# Altium PCB Fuente Simetrica.PcbDoc
Units mm, origin at the board's own origin, x right, y up, seen from the top; angles counter-clockwise.
Board outline 53.21 x 77.09 mm, 2 copper layers (Top Layer, Bottom Layer); 13 components, 8 nets, 34 pads, 0 vias.
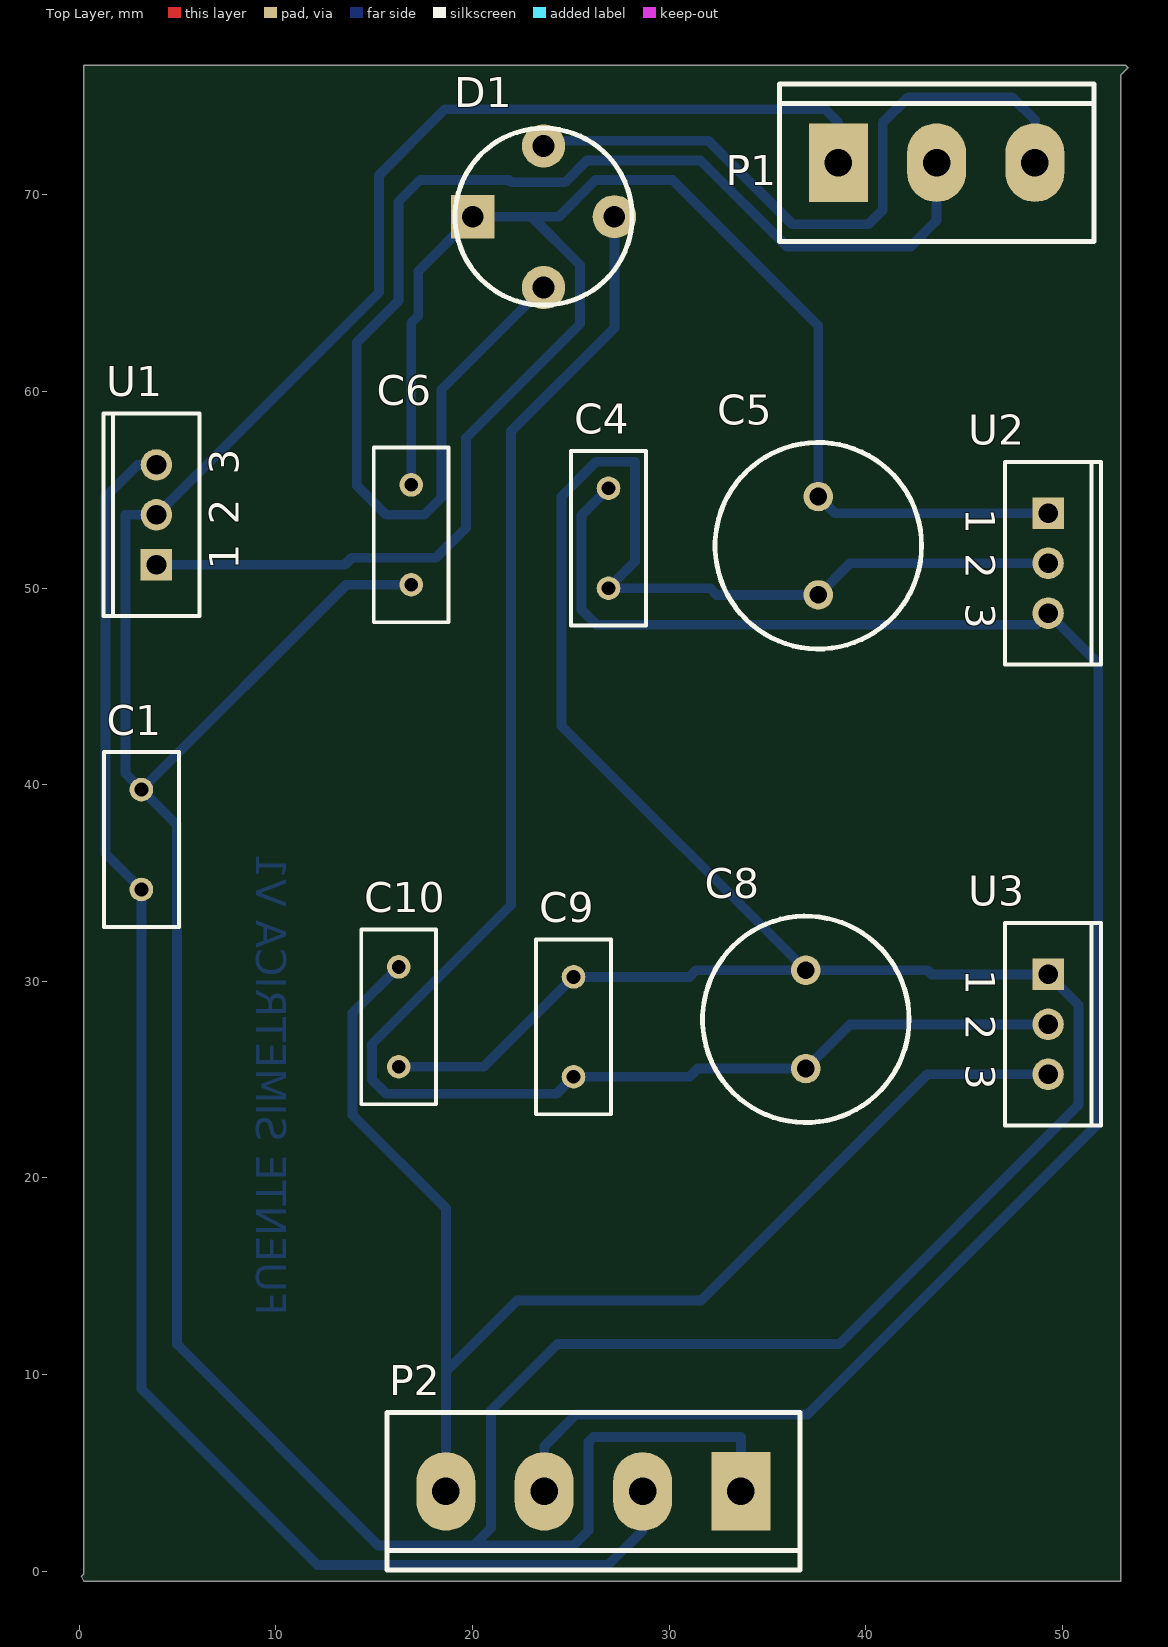
[diagram p0: Top Layer view]
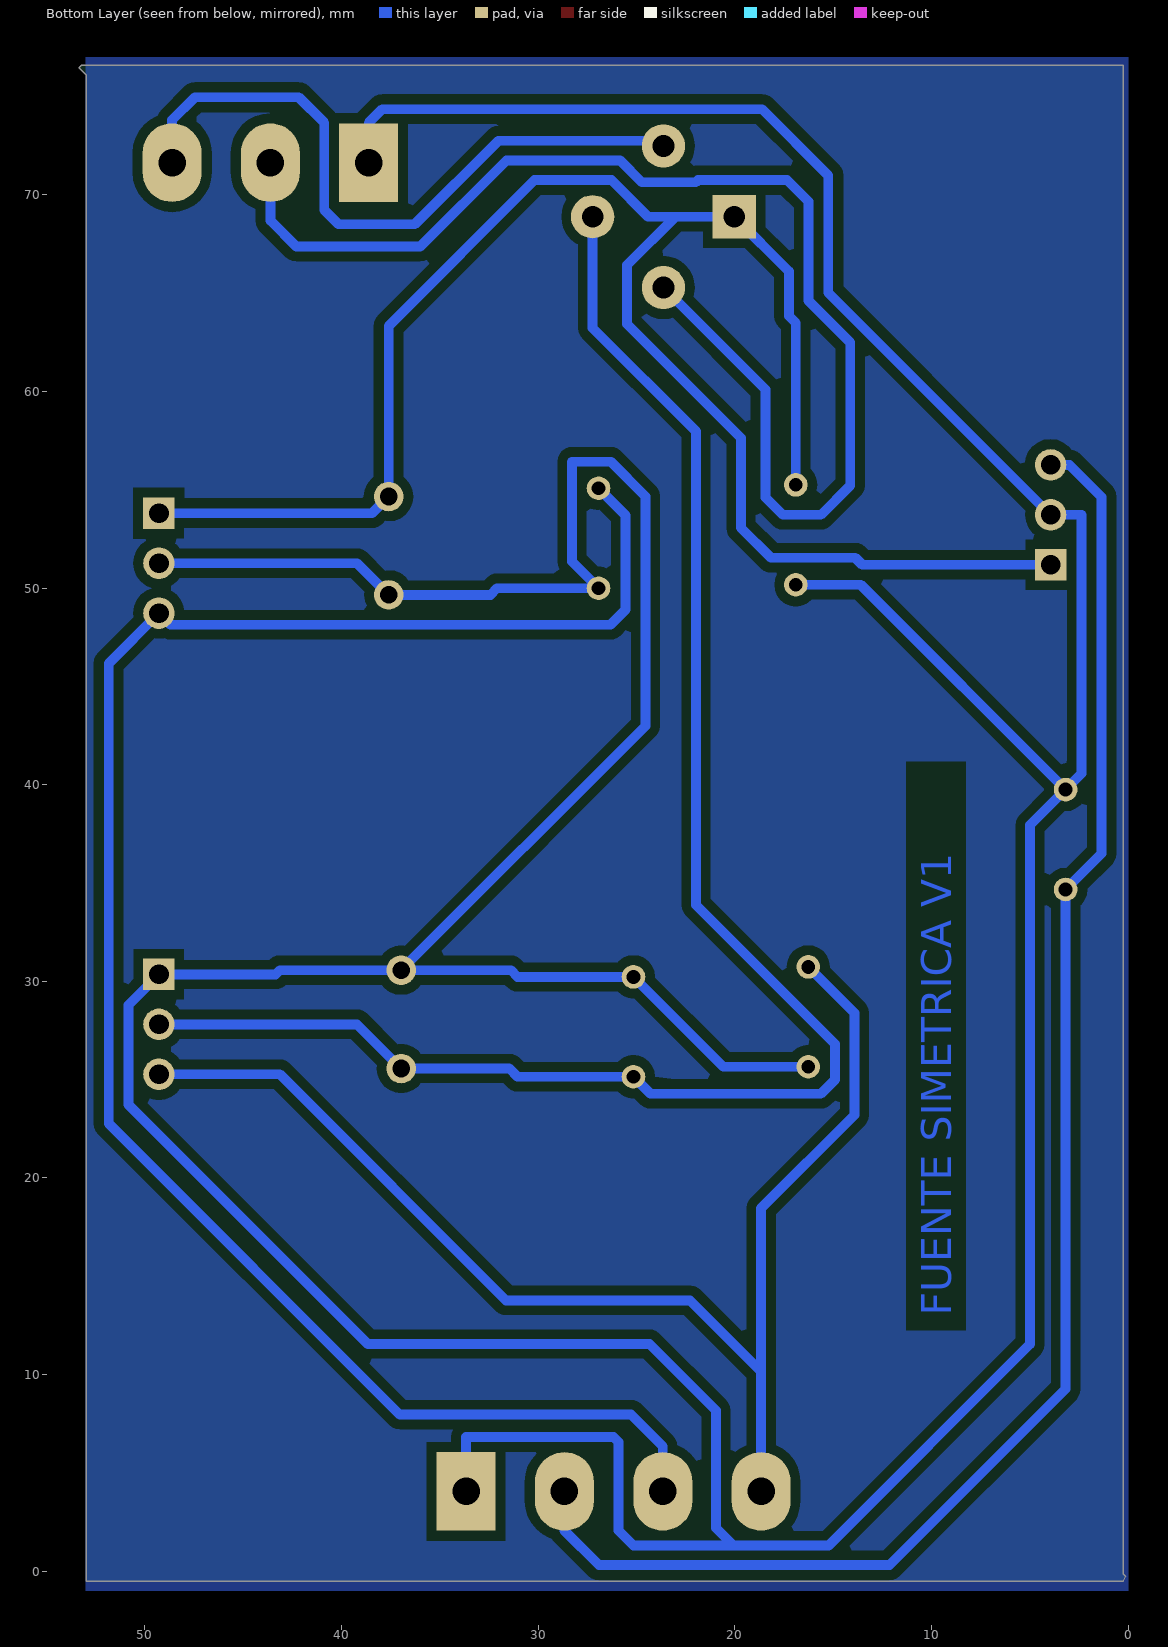
[diagram p1: Bottom Layer view, seen from below]

## Layer stack, top to bottom
Top Layer: signal copper 0.0356
Dielectric: dielectric 0.32, FR-4, Dk 4.8
Bottom Layer: signal copper 0.0356

## Board outline
0.254,-0.508 52.959,-0.508 52.959,76.073 53.34,76.454 53.213,76.581 0.254,76.581 0.254,-0.127 0.127,-0.254

## Design rules (kind name [scope] priority, off if disabled: settings)
Clearance [All] p1: gap=0.5
PolygonConnect [All] p1: connectstyle=Relief reliefconductorwidth=0.254 reliefentries=4 polygonreliefangle="90 Angle"
RoomDefinition "Fuente Simetrica" [InComponentClass('Fuente Simetrica')] p1: confinementstyle=ConfineIn formatcopy=TRUE lockcomponents=FALSE outline 0.381,-0.174 53.213,-0.174 53.213,76.915 0.381,76.915
RoutingLayers [All] p1: top layer_v5=FALSE bottom layer_v5=TRUE
RoutingVias [All] p1: holewidth=0.711 width=1.27 viastyle="Through Hole" minholewidth=0.711 minwidth=1.27 maxholewidth=0.711 maxwidth=1.27
SilkscreenOverComponentPads [All] p1: minsilkscreentomaskgap=0.254
SolderMaskExpansion [All] p1: expansion=0.102
Width [All] p1: maxlimit=0.7 minlimit=0.254 preferedwidth=0.5 toplayer_maxwidth=0.254 toplayer_prefwidth=0.254 bottomlayer_minwidth=0.5 minimp=50.000000 maximp=50.000000 favimp=50.000000
26 further rules are at their usual default settings.

## Components (designator, comment, footprint, x,y, rotation, side; value= is the part's Value field where it differs from the comment)
C1 "Cap" RAD-0.2 3.175,37.211 r270 top
C4 "Cap" RAD-0.2 26.924,52.531 r90 top
C5 "Cap Pol1" RB5-10.5 37.592,52.15 r270 top
C6 "Cap" RAD-0.2 16.891,52.705 r90 top
C8 "Cap Pol1" RB5-10.5 36.957,28.067 r270 top
C9 "Cap" RAD-0.2 25.146,27.686 r90 top
C10 "Cap" RAD-0.2 16.256,28.194 r90 top
D1 "Bridge1" PUENTE1A 23.622,65.278 r90 top
P1 "TRANS INPUT" AZUL5-3 38.608,71.628 r0 top
P2 "VOUT" AZUL5-4 33.655,4.064 r180 top
U1 "MC78M05BT" 221A-04 3.937,53.721 r90 top
U2 "MC78T12BT" 221A-04 49.276,51.261 r270 top
U3 "MC79M12CT" 221A-04 49.276,27.813 r270 top

## Footprints (in the part's own frame and the unit in brackets; to place one, negate y for a bottom-side part, rotate by r counter-clockwise, add the part's x,y. Pads: shape width x height; smd on the part's side, far side on the other; paste and mask are expansions set on the pad)
221A-04 [mm] "TO, Thru-Hole, Vertical, Heatsink Mounted; 3 In-Line Leads; Pitch 2.54 mm"
  rect 1.6x1.6 hole 1: 1(-2.54,0)
  round 1.6 hole 1: 2(0,0) 3(2.54,0)
  silkscreen extent -5.15,-2.2 5.15,2.7
AZUL5-3 [mm]
  rect 3x4 hole 1.4: 1(0,0)
  oval 3x4 hole 1.4: 2(5,0) 3(10,0)
  silkscreen extent -3,-4 13,4
AZUL5-4 [mm]
  rect 3x4 hole 1.4: 1(0,0)
  oval 3x4 hole 1.4: 2(5,0) 3(10,0) 4(15,0)
  silkscreen extent -3,-4 18,4
PUENTE1A [mm]
  round 2.2 hole 1.1: AC1(0,0) AC2(7.2,0) V-(3.6,-3.6)
  rect 2.2x2.2 hole 1.1: V+(3.6,3.6)
  silkscreen extent -0.9,-4.5 8.1,4.5
RAD-0.2 [mm] "Radial Cap, Thru-Hole; 2 Leads; 0.2 in Pin Spacing"
  round 1.2 hole 0.7: 1(-2.54,0) 2(2.54,0)
  silkscreen extent -4.44,-1.91 4.44,1.91
RB5-10.5 [mm] "Capacitor (Radial); 2 Leads"
  round 1.5 hole 0.9: 1(-2.5,0) 2(2.5,0)
  silkscreen extent -5.25,-5.25 5.25,5.25

## Part data
C1 C4 C6 C9 C10: "Capacitor"
C5 C8: "Polarized Capacitor (Radial)"
D1: "Full Wave Diode Bridge"
P1: library part "Header 3", "Header, 3-Pin"
P2: library part "Header 4", "Header, 4-Pin"
U1: "3-Terminal Medium-Current Positive Fixed Voltage Regulator"
U2: "Three-Ampere Positive Fixed Voltage Regulator"
U3: "Three-Terminal Negative Fixed Voltage Regulator"

## Nets (pads, with @x,y where several pads share a name; then routed paths per layer and width w, separated by ;. In a path a pad name is that pad's centre, name@x,y a point inside that pad or via, vN(x,y) a via of type N, cw(c..) or ccw(c..) an arc to the next point about the centre after c; other vN are vias at no path point)
AC1: D1.AC1 P1.2 | length 67.1
  Bottom Layer w0.5: D1.AC1 18.44,60.096 18.44,54.61 17.551,53.721 15.621,53.721 14.122,55.22 14.122,62.484 16.246,64.608 16.246,69.647 17.339,70.739 21.869,70.739 21.98,70.628 24.708,70.628 25.819,71.739 31.609,71.739 35.988,67.361 42.291,67.361 43.608,68.678 P1.2
AC2: D1.AC2 P1.3 | length 34.8
  Bottom Layer w0.5: D1.AC2 23.883,72.739 32.024,72.739 36.267,68.495 40.149,68.495 40.869,69.215 40.869,73.66 42.164,74.955 47.447,74.955 48.608,73.795 P1.3
GND: C1.1 C4.1 C5.2 C6.1 C8.1 C9.2 C10.1 P1.1 P2.1 U1.2 U2.2 U3.1 | length 302.3
  Bottom Layer w0.5: C10.1 20.574,25.654 C9.2 31.039,30.226 31.38,30.567 C8.1 ; C6.1 13.589,50.165 C1.1 ; P2.1 33.655,6.833 26.162,6.833 25.908,6.579 25.908,2.076 25.146,1.314 20.066,1.314 ; P1.1 38.608,73.66 37.922,74.346 18.606,74.346 15.246,70.986 15.246,65.03 U1.2 2.362,53.721 2.362,40.564 C1.1 ; U2.2 39.203,51.261 C5.2 32.421,49.65 32.08,49.991 C4.1 28.274,51.341 28.274,56.421 26.297,56.421 24.536,54.661 24.536,42.988 C8.1 ; C1.1 4.978,37.948 4.978,11.55 15.215,1.314 20.066,1.314 ; 20.066,1.314 20.955,2.203 20.955,8.179 24.333,11.557 38.66,11.557 50.826,23.723 50.826,28.803 U3.1 43.343,30.353 43.129,30.567 C8.1
V+: C5.1 C6.2 D1.V+ U1.1 U2.1 | length 92.8
  Bottom Layer w0.5: U1.1 13.513,51.181 13.868,51.537 18.161,51.537 19.685,53.061 19.685,57.633 25.476,63.424 25.476,66.421 23.019,68.878 ; C6.2 16.891,63.475 17.246,63.83 17.246,66.102 D1.V+ 23.019,68.878 ; U2.1 38.441,53.801 C5.1 37.592,63.322 30.175,70.739 26.264,70.739 24.403,68.878 23.019,68.878
V-: C8.2 C9.1 D1.V- U3.2 | length 85.1
  Bottom Layer w0.5: D1.V- 27.222,63.221 21.971,57.97 21.971,33.884 14.906,26.819 14.906,24.997 15.621,24.282 24.282,24.282 C9.1 31.039,25.146 31.46,25.567 C8.2 39.203,27.813 U3.2
VO+5: C1.2 P2.2 U1.3 | length 81.3
  Bottom Layer w0.5: U1.3 2.972,56.261 1.346,54.635 1.346,36.5 C1.2 3.175,9.271 12.132,0.314 26.905,0.314 28.655,2.064 P2.2
VO+12: C4.2 P2.3 U2.3 | length 95.3
  Bottom Layer w0.5: P2.3 23.655,6.35 25.281,7.976 37.034,7.976 51.826,22.767 51.826,46.171 U2.3 48.688,48.133 26.314,48.133 25.552,48.895 25.552,53.699 C4.2
VO-12: C10.2 P2.4 U3.3 | length 66.5
  Bottom Layer w0.5: C10.2 13.906,28.384 13.906,23.21 18.655,18.461 18.655,10.16 ; P2.4 18.655,10.16 ; U3.3 43.129,25.273 31.634,13.778 22.273,13.778 18.655,10.16

## Polygon pours and split planes (outlines as drawn)
no net on Bottom Layer "Bottom Overlay-No Net" (solid, pour order 4): 0,77 53,77 53,-1 0,-1

## Other copper
Bottom Layer:
  text "FUENTE SIMETRICA V1" at 9,13 h1.52 r270

## Text inside footprints (layer, text, board x,y; h text height)
U1: Top Overlay "1" at 8.112,50.931 h1.5 r90; Top Overlay "2" at 8.112,53.221 h1.5 r90; Top Overlay "3" at 8.112,55.761 h1.5 r90
U2: Top Overlay "1" at 45.101,54.051 h1.5 r270; Top Overlay "2" at 45.101,51.761 h1.5 r270; Top Overlay "3" at 45.101,49.221 h1.5 r270
U3: Top Overlay "1" at 45.101,30.603 h1.5 r270; Top Overlay "2" at 45.101,28.313 h1.5 r270; Top Overlay "3" at 45.101,25.773 h1.5 r270